# Altium PCB Keypadmacro.PcbDoc
Units mm, origin at the board's own origin, x right, y up, seen from the top; angles counter-clockwise.
Board outline 70 x 90 mm, 2 copper layers (F.Cu, B.Cu), stack 1.671 mm thick; 73 components, 71 nets, 268 pads, 1 vias.
Unrouted connection lines stored in the file: 117.
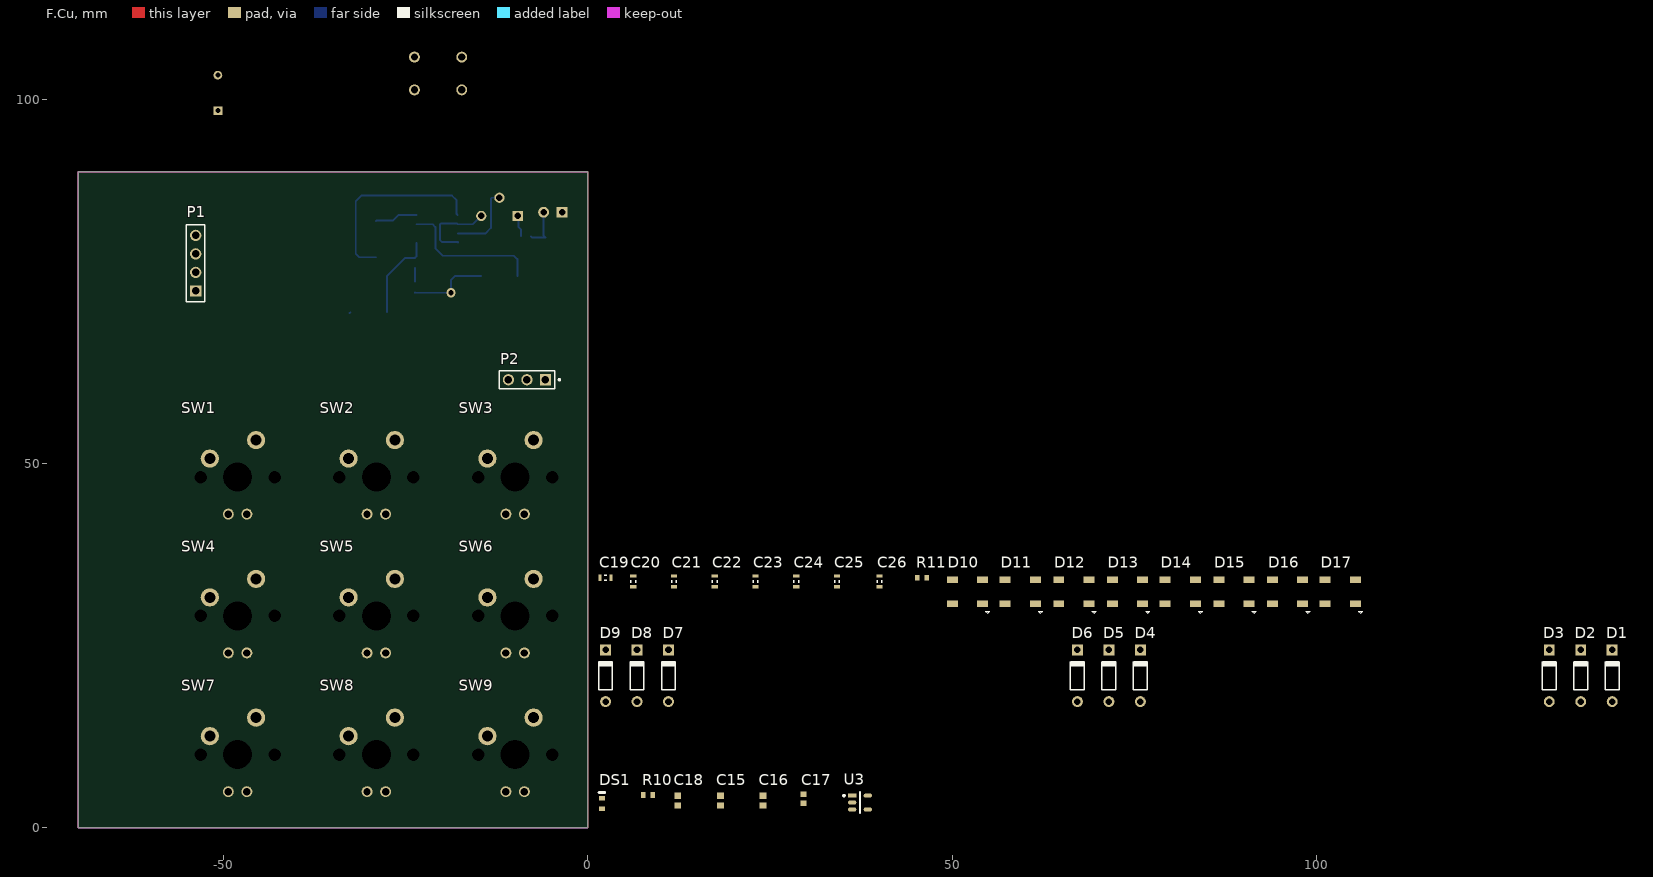
[diagram p0: F.Cu view]
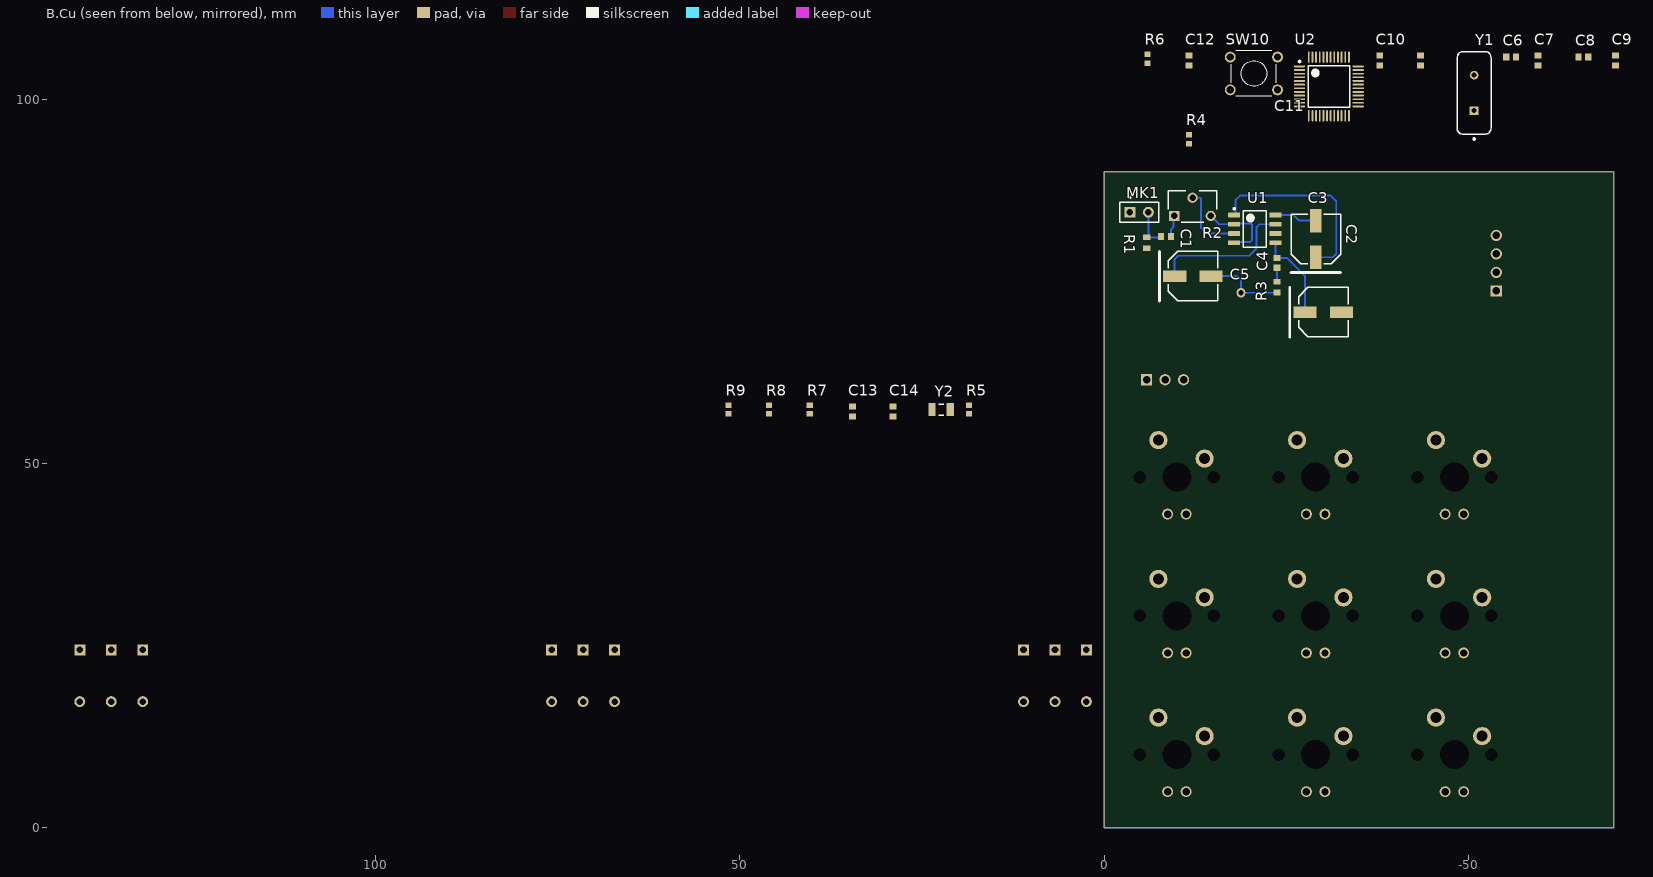
[diagram p1: B.Cu view, seen from below]

## Layer stack, top to bottom
F.Mask: solder mask 0.0102, Solder Resist, Dk 3.5
F.Cu: signal copper 0.0356
Dielectric 1: dielectric 1.6, FR-4, Dk 4.8
B.Cu: signal copper 0.0356
B.Mask: solder mask 0.0102, Solder Resist, Dk 3.5

## Board outline
-70,0 -70,90 0,90 0,0 -70,0

## Design rules (kind name [scope] priority, off if disabled: settings)
Clearance "Clearence 0.2_NetClass" [InNetClass('Default')] p1: gap=0.2 ignorepadtopadclearanceinfootprint=FALSE
HoleSize "Hole Size (Default)" [All] p1: absolutevalues=TRUE maxlimit=10 minlimit=0.3 maxpercent=80.000 minpercent=20.000
MinimumSolderMaskSliver [All] p1: minsoldermaskwidth=0
PolygonConnect [All] p1: connectstyle=Direct reliefconductorwidth=0.254 reliefentries=4 polygonreliefangle="90 Angle" airgapwidth=0.254
RoutingVias [All] p1: holewidth=0.711 width=1.27 viastyle="Through Hole" minholewidth=0.711 minwidth=1.27 maxholewidth=0.711 maxwidth=1.27
SilkToSilkClearance [All] p1: silktosilkclearance=0
SilkToSolderMaskClearance [IsPad] p1: minsilkscreentomaskgap=0 clearancetoexposedcopper=TRUE
SolderMaskExpansion [All] p1: expansion=0.102 istentingtop=FALSE
Width [All] p1: maxlimit=0.254 minlimit=0.254 preferedwidth=0.254
26 further rules are at their usual default settings.

## Classes and differential pairs
component class Designator: C1 C2 C3 C4 C5 MK1 R1 R2 R3 U1
component class Keypadmacro: J1 J2 P1 P2

## Components (designator, comment, footprint, x,y, rotation, side; value= is the part's Value field where it differs from the comment)
C1 "GRM188R60J106ME47D" CAPC1608X90X35NL10T15 -8.509,81.153 r180 bottom
C2 "EEEFP1V470AP" PNSC-FP-V-D_V -30.099,70.739 r180 bottom
C3 "EEEFP1V470AP" PNSC-FP-V-D_V -29.083,80.772 r90 bottom
C4 "GRM188R60J106ME47D" CAPC1608X90X35NL10T15 -23.749,77.515 r90 bottom
C5 "EEEFP1V470AP" PNSC-FP-V-D_V -12.192,75.692 r180 bottom
C6 "10uF" CAPC1608X90X35NL10T15 -55.88,105.791 r180 bottom
C7 "10uF" CAPC1608X90X35NL10T15 -59.563,105.283 r90 bottom
C8 "10uF" CAPC1608X90X35NL10T15 -65.786,105.791 r180 bottom
C9 "10uF" CAPC1608X90X35NL10T15 -70.231,105.283 r90 bottom
C10 "20pF" CAPC1608X90X35NL10T15 -37.846,105.283 r90 bottom
C11 "20pF" CAPC1608X90X35NL10T15 -43.434,105.283 r90 bottom
C12 "10uF" CAPC1608X90X35NL10T15 -11.684,105.283 r90 bottom
C13 "20pF" CAPC1608X90X35NL10T15 34.544,57.115 r90 bottom
C14 "20pF" CAPC1608X90X35NL10T15 28.956,57.115 r90 bottom
C15 "10uF" CAPC1608X90X35NL10T15 18.161,3.683 r90 top
C16 "10uF" CAPC1608X90X35NL10T15 24.003,3.683 r90 top
C17 "1uF" CAPC1608X90X35LL10T15 29.591,3.937 r90 top
C18 "10uF" CAPC1608X90X35NL10T15 12.319,3.683 r90 top
C19 "100nF" CAPC1608X90X20LL10 2.413,34.29 r0 top
C20 "100nF" CAPC1608X90X20LL10 6.223,33.782 r90 top
C21 "100nF" CAPC1608X90X20LL10 11.811,33.782 r90 top
C22 "100nF" CAPC1608X90X20LL10 17.399,33.782 r90 top
C23 "100nF" CAPC1608X90X20LL10 22.987,33.782 r90 top
C24 "100nF" CAPC1608X90X20LL10 28.575,33.782 r90 top
C25 "100nF" CAPC1608X90X20LL10 34.163,33.782 r90 top
C26 "100nF" CAPC1608X90X20LL10 40.005,33.782 r90 top
D1 "Diode 1N4148" DO-35 140.589,20.828 r90 top
D2 "Diode 1N4148" DO-35 136.271,20.828 r90 top
D3 "Diode 1N4148" DO-35 131.953,20.828 r90 top
D4 "Diode 1N4148" DO-35 75.819,20.828 r90 top
D5 "Diode 1N4148" DO-35 71.501,20.828 r90 top
D6 "Diode 1N4148" DO-35 67.183,20.828 r90 top
D7 "Diode 1N4148" DO-35 11.049,20.828 r90 top
D8 "Diode 1N4148" DO-35 6.731,20.828 r90 top
D9 "Diode 1N4148" DO-35 2.413,20.828 r90 top
D10 "WS2182B ADD LED 3.3V-5V" WS2182B 52.07,32.385 r0 top
D11 "WS2182B ADD LED 3.3V-5V" WS2182B 59.309,32.385 r0 top
D12 "WS2182B ADD LED 3.3V-5V" WS2182B 66.675,32.385 r0 top
D13 "WS2182B ADD LED 3.3V-5V" WS2182B 74.041,32.385 r0 top
D14 "WS2182B ADD LED 3.3V-5V" WS2182B 81.28,32.385 r0 top
D15 "WS2182B ADD LED 3.3V-5V" WS2182B 88.646,32.385 r0 top
D16 "WS2182B ADD LED 3.3V-5V" WS2182B 96.012,32.385 r0 top
D17 "WS2182B ADD LED 3.3V-5V" WS2182B 103.251,32.385 r0 top
DS1 "TLMS1000-GS08" VISH-TLMS1000_V 1.905,3.302 r90 top
MK1 "Mic2" PIN2 -3.556,84.455 r180 bottom
P1 "TSW-104-08-T-S" SMTC-TSW-104-08-X-S -53.848,73.66 r90 top
P2 "22-28-4033" MOLX-22-28-4033_V -8.382,61.468 r180 top
R1 "RT0603DRE0710KL" RESC1608X55X25ML10T15 -5.855,80.264 r270 bottom
R2 "PV37W101C01B00" FP-PV37W101C01B00-MFG -12.152,85.247 r0 bottom
R3 "RT0603DRE0710KL" RESC1608X55X25ML10T15 -23.749,74.168 r90 bottom
R4 "ERT-J1VR103J" RESC1608X90X30LL15T20 -11.684,94.488 r90 bottom
R5 "ERT-J1VR103J" RESC1608X90X30LL15T20 18.542,57.369 r90 bottom
R6 "ERT-J1VR103J" RESC1608X90X30LL15T20 -5.969,105.537 r90 bottom
R7 "ERT-J1VR103J" RESC1608X90X30LL15T20 40.386,57.369 r90 bottom
R8 "ERT-J1VR103J" RESC1608X90X30LL15T20 45.974,57.369 r90 bottom
R9 "ERT-J1VR103J" RESC1608X90X30LL15T20 51.562,57.369 r90 bottom
R10 "470R" RESC1608X55X25LL10T15 8.255,4.445 r0 top
R11 "100R" RESC1608X55X25LL10T15 45.847,34.29 r0 top
SW1 "Cherry MX with an LED" MX_Cherry_LED -48.1,48.1 r0 top
SW2 "Cherry MX with an LED" MX_Cherry_LED -29.05,48.1 r0 top
SW3 "Cherry MX with an LED" MX_Cherry_LED -10,48.1 r0 top
SW4 "Cherry MX with an LED" MX_Cherry_LED -48.1,29.05 r0 top
SW5 "Cherry MX with an LED" MX_Cherry_LED -29.05,29.05 r0 top
SW6 "Cherry MX with an LED" MX_Cherry_LED -10,29.05 r0 top
SW7 "Cherry MX with an LED" MX_Cherry_LED -48.1,10 r0 top
SW8 "Cherry MX with an LED" MX_Cherry_LED -29.05,10 r0 top
SW9 "Cherry MX with an LED" MX_Cherry_LED -10,10 r0 top
SW10 "430156070736" 430156070736 -20.574,103.505 r180 bottom
U1 "LM386M-1" D0008A_M -20.701,82.169 r180 bottom
U2 "STM32F103C8T6" STM-LQFP48_L -30.861,101.727 r180 bottom
U3 "MIC5219-3.3YM5-TR" FP-SOT23-5LD-PL-1-IPC_C 37.338,3.429 r0 top
Y1 "FOXSLF/080-20" FOX-FOXSLF080-20 -50.8,100.838 r90 bottom
Y2 "ABS07-120-32.768KHZ-T" ABRA-ABS07_A_V 22.352,57.369 r180 bottom

## Footprints (in the part's own frame and the unit in brackets; to place one, negate y for a bottom-side part, rotate by r counter-clockwise, add the part's x,y. Pads: shape width x height; smd on the part's side, far side on the other; paste and mask are expansions set on the pad)
430156070736 [mm] "6*6mm vertical type, THT, height 7.0mm, salmon actuator, 360gf, Bulk"
  round 1.5 hole 1: 1(-3.25,2.25) 2(-3.25,-2.25) 3(3.25,2.25) 4(3.25,-2.25)
  silkscreen extent -3.1,-3.1 3.1,3.1, body extent -3.95,-3.1 3.95,3.1, height 7.01
ABRA-ABS07_A_V [mm] "SMD, 2-Leads, Body 3.2x1.5mm"
  rect 1x1.8 smd: 1(-1.25,0) 2(1.25,0)
  silkscreen extent -0.35,-0.75 0.35,0.75, body extent -1.6,-0.75 1.6,0.75, height 0.9
CAPC1608X90X20LL10 [mm] "Chip Capacitor, 2-Leads, Body 1.70x0.90mm, IPC High Density"
  rect 0.45x0.85 smd: 1(-0.75,0) 2(0.75,0)
  silkscreen extent -0.15,-0.33 0.15,0.33, body extent -0.85,-0.45 0.85,0.45, height 0.9
CAPC1608X90X35LL10T15 [mm] "Chip Capacitor, 2-Leads, Body 1.60x0.80mm, IPC High Density"
  rect 0.75x0.85 smd: 1(-0.625,0) 2(0.625,0)
  body extent -0.85,-0.45 0.85,0.45, height 0.9
CAPC1608X90X35NL10T15 [mm] "Chip Capacitor, 2-Leads, Body 1.60x0.80mm, IPC Medium Density"
  rect 0.85x0.95 smd: 1(-0.675,0) 2(0.675,0)
  body extent -0.85,-0.45 0.85,0.45, height 0.9
D0008A_M [mm] "SOIC, 8-Leads, Body 5x4mm, Pitch 1.27mm, IPC Low Density"
  rrect15% 1.65x0.65 smd: 1(-2.825,1.905) 2(-2.825,0.635) 3(-2.825,-0.635) 4(-2.825,-1.905) 5(2.825,-1.905) 6(2.825,-0.635) 7(2.825,0.635) 8(2.825,1.905)
  silkscreen extent -2.95,-2.5 1.6,2.9, body extent -3,-2.45 3,2.45, height 1.63
DO-35 [mm] "Diode, Axial; Body 3.8 x 1.9 mm (LxDia. max), Lead Dia. 0.53 mm (max)"
  round 1.5 hole 0.9: 1(-3.55,0)
  rect 1.5x1.5 hole 0.9: 2(3.55,0)
  silkscreen extent -1.95,-0.95 2.05,0.95
FOX-FOXSLF080-20 [mm] "THD, 2-Leads, Body 11.35x4.65mm"
  rect 1.2x1.2 hole 0.7: 1(-2.44,0)
  round 1.2 hole 0.7: 2(2.44,0)
  silkscreen extent -6.45,-2.32 5.68,2.32, body extent -5.67,-2.32 5.68,2.33, height 3.6
FP-PV37W101C01B00-MFG [mm]
  rect 1.4x1.4 hole 0.9 paste-1000 mask+0: 1(2.5,1.3)
  round 1.4 hole 0.9 paste-1000 mask+0: 2(0,-1.2) 3(-2.5,1.3)
  silkscreen extent -3.35,-2.15 3.35,2.15, body extent -3.2,-2 3.2,2, height 8.3
FP-SOT23-5LD-PL-1-IPC_C [mm]
  rect 1.156x0.53 smd paste+0 mask+0: 1(-1.075,0.95)
  rrect100% 1.156x0.53 smd paste+0 mask+0: 2(-1.075,0) 3(-1.075,-0.95) 4(1.075,-0.95) 5(1.075,0.95)
  silkscreen extent -2.33,-1.45 0,1.45, body extent -1.75,-1.55 1.75,1.55, height 0.25
MOLX-22-28-4033_V [mm] "THD, 3-Leads, Body 7.62x2.49mm, Pitch 2.54mm"
  rect 1.55x1.55 hole 1.02: 1(-2.54,0)
  round 1.55 hole 1.02: 2(0,0) 3(2.54,0)
  silkscreen extent -4.59,-1.24 3.81,1.24, body extent -3.81,-1.24 3.81,1.24, height 8.38
MX_Cherry_LED [mm] "Cherry Key Pad with LED"
  round 2.5 hole 1.5: 1(2.54,5.08) 2(-3.81,2.54)
  round 1.5 hole 1: 3(-1.27,-5.08) 4(1.27,-5.08)
  round 0 hole 1.702: 6(-5.08,0) 6(5.08,0)
  round 0 hole 3.988: Hole(0,0)
  body extent -7.75,-7.8 7.85,7.8, height 14.9
PIN2 [mm] "Photosensitive Diode; 2 Leads"
  rect 1.5x1.5 hole 0.9: 1(0,0)
  round 1.5 hole 0.9: 2(2.54,0)
  silkscreen extent -1.4,-1.4 3.94,2.17
PNSC-FP-V-D_V [mm] "CAPAE, 2-Leads, Body 6.80x6.80mm"
  rect 3.2x1.6 smd: 1(-2.5,0) 2(2.5,0)
  silkscreen extent -4.6,-3.4 3.4,3.4, body extent -3.9,-3.4 3.9,3.4, height 6.1
RESC1608X55X25LL10T15 [mm] "Chip Resistor, 2-Leads, Body 1.70x0.90mm, IPC High Density"
  rect 0.6x0.8 smd: 1(-0.65,0) 2(0.65,0)
  body extent -0.85,-0.45 0.85,0.45, height 0.55
RESC1608X55X25ML10T15 [mm] "Chip Resistor, 2-Leads, Body 1.60x0.80mm, IPC Low Density"
  rect 0.8x1 smd: 1(-0.75,0) 2(0.75,0)
  body extent -0.85,-0.45 0.85,0.45, height 0.55
RESC1608X90X30LL15T20 [mm] "Chip Resistor, 2-Leads, Body 1.60x0.80mm, IPC High Density"
  rect 0.75x0.85 smd: 1(-0.6,0) 2(0.6,0)
  body extent -0.87,-0.48 0.88,0.48, height 0.9
SMTC-TSW-104-08-X-S [mm] ".025 SQ Post Terminal Strip Assembly, 1x4 Pins, Vertical, 2.54mm Pitch, Male"
  rect 1.55x1.55 hole 1.02: 1(0,0)
  round 1.55 hole 1.02: 2(2.54,0) 3(5.08,0) 4(7.62,0)
  silkscreen extent -1.46,-1.27 9.08,1.27, body extent -1.27,-1.27 8.89,1.27, height 8.38
STM-LQFP48_L [mm] "QFP, 48-Leads, Body 7x7mm, Pitch 0.5mm, IPC High Density"
  oval 1.55x0.25 smd: 1(-4.025,2.75) 2(-4.025,2.25) 3(-4.025,1.75) 4(-4.025,1.25) 5(-4.025,0.75) 6(-4.025,0.25) 7(-4.025,-0.25) 8(-4.025,-0.75) 9(-4.025,-1.25) 10(-4.025,-1.75) 11(-4.025,-2.25) 12(-4.025,-2.75) 25(4.025,-2.75) 26(4.025,-2.25) 27(4.025,-1.75) 28(4.025,-1.25) 29(4.025,-0.75) 30(4.025,-0.25) 31(4.025,0.25) 32(4.025,0.75) 33(4.025,1.25) 34(4.025,1.75) 35(4.025,2.25) 36(4.025,2.75)
  oval 0.25x1.55 smd: 13(-2.75,-4.025) 14(-2.25,-4.025) 15(-1.75,-4.025) 16(-1.25,-4.025) 17(-0.75,-4.025) 18(-0.25,-4.025) 19(0.25,-4.025) 20(0.75,-4.025) 21(1.25,-4.025) 22(1.75,-4.025) 23(2.25,-4.025) 24(2.75,-4.025) 37(2.75,4.025) 38(2.25,4.025) 39(1.75,4.025) 40(1.25,4.025) 41(0.75,4.025) 42(0.25,4.025) 43(-0.25,4.025) 44(-0.75,4.025) 45(-1.25,4.025) 46(-1.75,4.025) 47(-2.25,4.025) 48(-2.75,4.025)
  silkscreen extent -4.15,-2.85 2.85,3.55, body extent -3.5,-3.5 3.5,3.5, height 1.6
VISH-TLMS1000_V [mm] "SMD, 2-Leads, Body 0.8x1.6mm"
  rect 0.6x0.8 smd: 1(-0.725,0) 2(0.725,0)
  silkscreen extent 1.52,-0.4 1.52,0.4, body extent -0.8,-0.4 0.8,0.4, height 0.65
WS2182B [mm]
  rect 1.5x0.9 smd: 1(-2.058,1.651) 2(-2.058,-1.649) 3(2.092,-1.649) 4(2.092,1.651)
  silkscreen extent 2.49,-2.97 3.1,-2.67, body extent -2.68,-2.47 2.68,2.47, height 1.7

## Part data
C1 C4: library part CMP-2006-02792-1, Manufacturer=Murata, Part Number=GRM188R60J106ME47D
C2 C3 C5: library part CMP-2000-06216-1, "Aluminum Electrolytic Capacitor, 47 uF, +/- 20%, 35 V, 2-Pin SMD (Size Code D), -55 to 105 degC, RoHS, Tape and Reel", Capacitance=47µF, Case Size/Dimension=Ø6.3x5.8mm, ESR (Equivalent Series Resistance)=0.26O, Lifetime@Temperature=2000Hrs@105°C, Manufacturer=Panasonic, Operating Temp Range=-55to+105°C, Operating Temp-Max=105°C, Package Description="2-Pin Electrolytic Aluminum Capacitor, Body 6.6 x 6.6 mm", Package Reference=FP-V-D, Rated Voltage=35V, Ripple Current=300mA, Datasheet URL=http://industrial.panasonic.com/cdbs/www-data/pdf/RDE0000/ABA0000C1184.pdf, Datasheet Version=03/2016, Manufacturer URL=http://www.panasonic.com/, Mounting Technology=SurfaceMount, Package URL=http://industrial.panasonic.com/cdbs/www-data/pdf/RDE0000/DME0000COL48.pdf, Series=FP, Type=Can
C6 C7 C8 C9 C10 C11 C12 C13 C14 C15 C16 C18: library part CMP-2006-02792-1, Manufacturer=Murata, Part Number=GRM188R60J106ME47D
C17: library part CMP-2006-02459-1, Manufacturer=Murata, Part Number=GRM188R61E105KA12D
C19 C20 C21 C22 C23 C24 C25 C26: library part CMP-2000-07546-1, "Chip Capacitor, 0.1 uF, +/- 10%, 50 V, -55 to 125 degC, 0603 (1608 Metric), RoHS, Tape and Reel", Case Code (Imperial)=0603, Case Code (Metric)=1608, Dielectric=X7R, Manufacturer=TDK, Max Operating Temperature=125degC, Min Operating Temperature=-55degC, Package Description="2-Pin Surface Mount Device, Body 1.6 x 0.8 mm", Package Quantity=1, Package Reference=603, Tolerance=10%, Voltage=50V, Capacitance=100nF, Case/Package=0603, Composition=Ceramic, Datasheet URL=https://product.tdk.com/info/en/catalog/datasheets/mlcc_automotive_general_en.pdf, Datasheet Version=12/2014, Depth=0.8mm, Height=0.8mm, Lead Free=LeadFree, Length=1.6mm, Manufacturer URL=http://www.tdk.com/, Mount=SurfaceMount, Mounting Technology=SurfaceMount, Packaging=TapeandReel, Radiation Hardening=No, REACH SVHC=NoSVHC, RoHSCompliant=True, Termination=SMD/SMT, Thickness=0.035inch, Voltage Rating=50V, Voltage Rating (DC)=50V, Weight=7.1E-05oz, Width=0.8mm
D1 D2 D3 D4 D5 D6 D7 D8 D9: "High Conductance Fast Diode", Code_JEDEC=DO-204-AH, ComponentLink1Description="Manufacturer Link", ComponentLink1URL=http://www.fairchildsemi.com/, ComponentLink2Description=Datasheet, ComponentLink2URL=http://www.fairchildsemi.com/ds/1N%2F1N4148.pdf, DatasheetVersion=1997, LatestRevisionDate=17-Jul-2002, LatestRevisionNote="Re-released for DXP Platform.", PackageDescription="Diode, Axial; Body 3.8 x 1.9 mm (LxDia. max), Lead Dia. 0.53 mm (max)", PackageReference=DO-35, Published=8-Jun-2000, Publisher="Altium Limited"
D10 D11 D12 D13 D14 D15 D16 D17: library part WS2182B
DS1: library part CMP-2000-07254-1, "Low Current LED, 40 mW, 1.8 V, -40 to 100 degC, 2-Pin SMD (0603), RoHS, Tape and Reel", Forward Current If=2mA, Forward Voltage=1.8V, LED Colour=Red, Manufacturer=Vishay, Package Description="2-Pin Surface Mount Device, Body 1.6 x 0.8 mm", Package Reference=TLMS1000, Automotive Qualification Standard=AEC-Q100, Bulb Size=1.6mmx0.8mm, Datasheet URL=https://datasheet.ciiva.com/5798/1698881-5798337.pdf, Datasheet Version="Rev. 1.7, 02/2011", LED Mounting=SMD, Lens Shape=Rectangular, Luminous Intensity=4mcd, Manufacturer URL=http://www.vishay.com/, Mounting Technology=SurfaceMount, MSL=MSL2-1year, Packaging=CutTape, Product Range=-, SVHC=ToBeAdvised, Viewing Angle=80°, Wavelength Typ=636nm
MK1: "Microphone", LatestRevisionDate=17-Jul-2002, LatestRevisionNote="Re-released for DXP Platform.", PackageReference=PIN2, Published=24-Mar-1999, Publisher="Altium Limited"
P1: library part CMP-1024-00356-1, "0.025\" SQ Post Header, Through-hole, Vertical, -55 to 105 degC, 2.54 mm Pitch, 4-Pin, Male, RoHS", Manufacturer=Samtec, Temperature Range="-55 to 105 degC", ComponentLink1Description="Manufacturer URL", ComponentLink1URL=http://www.samtec.com, ComponentLink2Description=Datasheet, ComponentLink2URL=http://www.samtec.com/documents/webfiles/pdf/TSW_TH.PDF, ComponentLink3Description="Package Specification", ComponentLink3URL=http://www.samtec.com/documents/webfiles/cpdf/TSW-XXX-XX-XXX-X-XX-XXX-MKT.pdf, DatasheetVersion=F-214, Mounting Technology=Through-hole, Orientation=Vertical, PackageDescription=".025[0.64] SQ. Post Terminal Strip Assembly", PackageReference=TSW-104-08-X-S, PackageVersion="DM, 8/1988", PartNumber=TSW-104-08-T-S, Pitch="2.54 mm", RoHS=True
P2: library part CMP-1676-00001-5, "Male Header, Pitch 2.54 mm, 1 x 3 Position, Height 8.38 mm, Tail Length 3.18 mm, RoHS, Bulk", Colour=Black, Current Rating="4 A", Manufacturer=Molex, Max Operating Temperature="75 degC", Min Operating Temperature="0 degC", Package Quantity=1, Voltage Rating="250 V", ComponentLink1Description="Manufacturer URL", ComponentLink1URL=http://www.molex.com/, ComponentLink2Description=Datasheet, ComponentLink2URL=http://www.molex.com/pdm_docs/sd/022284033_sd.pdf, Contact Finish=Gold, Contact Material=Brass, Contact Plating=Gold, DatasheetVersion="Rev. G, 01/2012", Height="8.38 mm", Lead Pitch="0.1 inch", Length="7.62 mm", Mount="Through Hole", Mounting Technology="Through Hole", PackageDescription="Male Header, Pitch 2.54 mm, 1 x 3 Position, Height 8.38 mm, Tail Length 3.18 mm", PackageReference=22-28-4033, Packaging=Bulk, Pins=3, REACH SVHC=Unknown, RoHSCompliant=true, Rows=1
R1 R3: library part CMP-2000-04608-1, Manufacturer=Yageo, Part Number=RT0603DRE0710KL
R2: library part CMP-06028-000002-1, "TRIMMER 100 OHM 0.25W PC PIN TOP", Color=Grey, Max Operating Temperature=125°C, Max Power Dissipation=250mW, Min Operating Temperature=-55°C, Package Quantity=50, Resistance=100R, Temperature Coefficient=150ppm/°C, Tolerance=10%, Composition=Cermet, Height=0.264inch, Lead Free="Lead Free", Length=0.252inch, Mount="Through Hole", Number of Turns=12, Packaging=Bulk, Power Rating=250mW, Radiation Hardening=No, Taper=Linear, Termination="PC Pin", Weight=340mg, Width=0.157inch
R4 R5 R6 R7 R8 R9: library part CMP-2000-00869-1, Manufacturer=Panasonic, Part Number=ERT-J1VR103J
R10 R11: library part CMP-1659-00035-1, "General Purpose Chip Resistor, 470 Ohm, +/- 1%, -55 to 155 degC, 0603 (1608 Metric), RoHS, Tape and Reel", Max Operating Temperature="90 degC", Min Operating Temperature="-40 degC", Package Quantity=2500, Resistance="50 Ohm", ComponentLink1Description="Manufacturer URL", ComponentLink1URL=http://www.yageo.com/, ComponentLink2Description=Datasheet, ComponentLink2URL=https://datasheet.ciiva.com/11808/0900766b80f96399-11808177.pdf, Contact Material=Brass, Contact Plating=Gold, DatasheetVersion="Rev. 4, 04/2009", Fastening Type=Snap, Height="1.25 mm", Impedance="50 Ohm", Length="3 mm", Mount="Surface Mount", PackageDescription="2-Pin Surface Mount Device, Body 1.6 x 0.8 mm", PackageReference=0603, Packaging="Tape and Reel", Radiation Hardening=No, RoHSCompliant=true, Width="3.1 mm"
SW1 SW2 SW3 SW4 SW5 SW6 SW7 SW8 SW9: library part MX_Cherry_LED
SW10: library part CMP-1453-00006-1, "WS-TATV THT Tact Switch 6X6 mm", Manufacturer="Wuerth Elektronik", ComponentLink1Description="Manufacturer URL", ComponentLink1URL=http://www.we-online.com, ComponentLink2Description=Datasheet, ComponentLink2URL=http://katalog.we-online.de/em/datasheet/4301x6.pdf, NoPins=04, PackageReference=430156070736, PartNumber=430156070736
U1: library part CMP-0057-00421-3, "Low Voltage Audio Power Amplifier, 8-pin Narrow SOIC", Manufacturer="Texas Instruments", PackageTopMarking=NSZXTT*LM386*M-1, PowerWise=N, Code_IPC=SOIC127P600-8, Code_JEDEC=MS-012-AA, ComponentLink1Description="Datasheet URL", ComponentLink1URL=http://www.ti.com/general/docs/lit/getliterature.tsp?genericPartNumber=LM386&fileType=pdf, CompType="Audio IC", PackageDescription="SOIC Narrow, 4.9 x 3.9 x 1.45mm, 8 Lead, 1.27mm Pitch", PackageReference=D0008A, PinCount=8, RoHS=N
U2: library part CMP-0237-00215-3, "ARM Cortex-M3 32-bit MCU, 64 KB Flash, 20 KB Internal RAM, 37 I/Os, 48-pin LQFP, -40 to 85 degC, Tray", I/Os (High Current)=37, Operating Frequency(F) (Processor speed) (MHz)=72, Supply Voltage(Vcc) min (V)=2, A/D Converter="2x12-bit (10 Channel)", ComponentLink1Description="Manufacturer URL", ComponentLink1URL=http://www.st.com/web/en/home.html, ComponentLink2Description=Datasheet, ComponentLink2URL=http://www.st.com/st-web-ui/static/active/en/resource/technical/document/datasheet/CD00161566.pdf, ComponentLink3Description="Package Specification", ComponentLink3URL=http://www.st.com/st-web-ui/static/active/en/resource/technical/document/datasheet/DM00058181.pdf, Core="ARM Cortex-M3", DatasheetVersion="Rev. 16", FLASH Size (Prog) (kB)=64, Internal RAM Size (kB)=20, Mounting Technology="Surface Mount", PackageDescription="48-Pin Low Profile Quad Flat Package, 7 x 7 mm Body, 0.5 mm Pitch", PackageReference=LQFP48, PackageVersion="Rev. 6, 06/2013", Packing=Tray, PartNumber=STM32F103C8T6
U3: library part CMP-06324-000027-1, "IC REG LINEAR 3.3V 500MA SOT23-5", Case/Package=SOT-23-5, Dropout Voltage=350mV, Max Input Voltage=12V, Max Operating Temperature=125°C, Min Input Voltage=2.5V, Min Operating Temperature=-40°C, Nominal Output Voltage=3.3V, Output Current=500mA, Lead Free="Lead Free", Mount="Surface Mount", Number of Pins=5, Number of Regulators=1, Output Type=Fixed, Output Voltage=3.3V, Packaging="Cut Tape", REACH SVHC="No SVHC"
Y1: library part CMP-1749-00002-1, "Resistance Weld Thru-Hole Crystal, 8 MHz, -20 to 70 degC, 2-Pin THD, RoHS, Bulk", Case\Package=TO-263-3, Dropout Voltage="2 V", Max Input Voltage="35 V", Max Operating Temperature="125 degC", Max Ouput Current="1 A", Min Input Voltage="7 V", Min Operating Temperature="0 degC", Nominal Output Voltage="5 V", Package Quantity=50, ComponentLink1Description="Manufacturer URL", ComponentLink1URL=http://www.foxonline.com/, ComponentLink2Description=Datasheet, ComponentLink2URL=http://download.siliconexpert.com/pdfs/2015/4/5/6/5/7/200/fox_/manual/35607121449963728hc49slf.pdf, DatasheetVersion=Mar-15, Height="30.02 mm", Length="10.24 mm", Mount="Surface Mount", Output Current="1 A", Output Voltage="5 V", Outputs=1, PackageDescription="2-Pin Through Hole Device, Body 11.35 x 4.65 mm", PackageReference=FOXSLF080-20, Packaging=Rail/Tube, Pins=3, Radiation Hardening=No, REACH SVHC="No SVHC", RoHSCompliant=true, Width="9.35 mm"
Y2: library part CMP-2000-07587-1, "Tuning Fork Crystal, 32.768 KHz, +/- 20 ppm, -40 to 85 degC, 2-Pin SMD, RoHS, Tape and Reel", Case\/Package=SMD/SMT, ESR (Equivalent Series Resistance)=55KOhm, Frequency=32.768KHz, Frequency Tolerance=20ppm, Load Capacitance=6pF, Manufacturer=Abracon, Max Operating Temperature=85degC, Min Operating Temperature=-40degC, Package Description="2-Pin Surface Mount Device, Body 3.2 x 1.5 mm", Package Quantity=3000, Package Reference=ABS07, Series Resistance=60KOhm, Datasheet URL=http://www.abracon.com/Resonators/ABS07-120-32.768kHz-T.pdf, Datasheet Version=11/2014, Depth=1.5mm, Height=0.035inch, Lead Free=LeadFree, Length=3.2mm, Manufacturer URL=http://www.abracon.com/, Mount=SurfaceMount, Mounting Technology=SurfaceMount, Number of Pins=2, Packaging=TapeandReel, Radiation Hardening=No, REACH SVHC=NoSVHC, RoHSCompliant=True, Termination=SMD/SMT, Tolerance=20ppm, Width=0.061inch

## Via types
v1: diameter 1.27, hole 0.711, F.Cu to B.Cu, 1 vias

## Nets (pads, with @x,y where several pads share a name; then routed paths per layer and width w, separated by ;. In a path a pad name is that pad's centre, name@x,y a point inside that pad or via, vN(x,y) a via of type N, cw(c..) or ccw(c..) an arc to the next point about the centre after c; other vN are vias at no path point)
+3.3V: C15.2 C16.2 C17.2 P1.2 R1.2 R10.1 U1.6 U3.5
+3V3: C6.2 C7.2 C8.2 C9.2 R4.2 R5.2 R6.2 R7.2 U2.1 U2.9 U2.24 U2.36 U2.48 | length 0.2
  B.Cu w0.254: -32.726,70.612 -32.599,70.739
+BATT: C18.2 C19.2 C20.2 C21.2 C22.2 C23.2 C24.2 C25.2 C26.2 D10.1 D11.1 D12.1 D13.1 D14.1 D15.1 D16.1 D17.1 P2.1 U3.1 U3.3
BOOT0: U2.44
CH_COL1: D3.1 D6.1 D9.1 U2.40
CH_COL2: D2.1 D5.1 D8.1 U2.41
CH_COL3: D1.1 D4.1 D7.1 U2.42
CH_ROW1: SW1.1 SW2.1 SW3.1 U2.18
CH_ROW2: SW4.1 SW5.1 SW6.1 U2.19
CH_ROW3: SW7.1 SW8.1 SW9.1 U2.20
D+: R8.2
D-: R9.2
D_IN: R11.1 U2.11
DIN_EXT: P2.2 U2.12
GND: C5.2 C15.1 C16.1 C17.1 C18.1 C19.1 C20.1 C21.1 C22.1 C23.1 C24.1 C25.1 C26.1 D10.3 D11.3 D12.3 D13.3 D14.3 D15.3 D16.3 D17.3 DS1.2 MK1.1 P1.1 P2.3 R2.3 R3.1 SW1.4 SW2.4 SW3.4 SW4.4 SW5.4 SW6.4 SW7.4 SW8.4 SW9.4 U1.2 U1.4 U3.2 | length 22.1
  B.Cu w0.254: R3.1 -23.737,73.406 v1(-18.796,73.406) -18.796,75.184 -18.288,75.692 C5.2 ; U1.4@-17.828,80.312 -17.907,80.391 -20.066,80.391 -20.32,80.645 -20.32,82.782 -20.171,82.931 -18.003,82.931 U1.2 -15.795,82.804 R2.3
MIC_OUT_TO_CONTROLLER: C2.2 U2.10
NetC1_1: C1.1 MK1.2 R1.1 | length 5.6
  B.Cu w0.254: C1.1 -7.695,81.014 R1.1 -6.096,81.255 MK1.2
NetC1_2: C1.2 R2.1 | length 3
  B.Cu w0.254: R2.1 -9.525,83.82 -9.525,82.423 -9.184,82.082 C1.2
NetC2_1: C2.1 C4.2 U1.5 | length 12
  B.Cu w0.254: C2.1 -27.599,75.652 -25.061,78.19 C4.2 -23.526,78.413 U1.5
NetC3_1: C3.1 U1.1 | length 26.7
  B.Cu w0.254: C3.1 -31.409,78.272 -31.877,78.74 -31.877,85.979 -31.115,86.741 -18.669,86.741 -18.034,86.106 -18.034,84.232 U1.1
NetC3_2: C3.2 U1.8 | length 5.9
  B.Cu w0.254: C3.2 -29.043,83.312 -26.797,83.312 -26.035,84.074 U1.8
NetC4_1: C4.1 R3.2 | length 1.9
  B.Cu w0.254: R3.2 C4.1
NetC5_1: C5.1 U1.7 | length 19.9
  B.Cu w0.254: U1.7 -21.336,82.804 -20.955,82.423 -20.955,79.502 -19.939,78.486 -10.16,78.486 -9.692,78.018 C5.1
NetD1_2: D1.2 SW1.2
NetD2_2: D2.2 SW2.2
NetD3_2: D3.2 SW3.2
NetD4_2: D4.2 SW4.2
NetD5_2: D5.2 SW5.2
NetD6_2: D6.2 SW6.2
NetD7_2: D7.2 SW7.2
NetD8_2: D8.2 SW8.2
NetD9_2: D9.2 SW9.2
NetD10_2: D10.2 D11.4
NetD10_4: D10.4 R11.2
NetD11_2: D11.2 D12.4
NetD12_2: D12.2 D13.4
NetD13_2: D13.2 D14.4
NetD14_2: D14.2 D15.4
NetD15_2: D15.2 D16.4
NetD16_2: D16.2 D17.4
NetDS1_1: DS1.1 R10.2
NetR2_2: R2.2 U1.3 | length 10.1
  B.Cu w0.254: U1.3 -14.097,81.534 -13.335,82.296 -13.335,86.298 -13.186,86.447 R2.2
OSCIN: C10.2 U2.5 Y1.1
OSCOUT: C11.2 U2.6 Y1.2
PA3: U2.13
PA4: U2.14
PA5: U2.15
PA6: U2.16
PA7: U2.17
PA8: U2.29
PA9_TX: U2.30
PA11: R9.1 U2.32
PA12: R7.1 R8.1 U2.33
PA13_SWDIO: U2.34
PA14_SWCLK: U2.37
PA15: U2.38
PB3_SWO: U2.39
PB7: U2.43
PB8: U2.45
PB9: U2.46
PB12: U2.25
PB13: U2.26
PB14: U2.27
PB15: U2.28
PC13: U2.2
PC14: C13.2 U2.3 Y2.1
PC15: C14.2 U2.4 Y2.2
RST: C12.2 R4.1 SW10.2 SW10.4 U2.7
RX_PA10: U2.31
SCL: R5.1 U2.21
SDA: R6.1 U2.22
pads on no net: C6.1 C7.1 C8.1 C9.1 C10.1 C11.1 C12.1 C13.1 C14.1 D17.2 P1.3 P1.4 SW1.3 SW1.6 SW1.Hole SW2.3 SW2.6 SW2.Hole SW3.3 SW3.6 SW3.Hole SW4.3 SW4.6 SW4.Hole SW5.3 SW5.6 SW5.Hole SW6.3 SW6.6 SW6.Hole SW7.3 SW7.6 SW7.Hole SW8.3 SW8.6 SW8.Hole SW9.3 SW9.6 SW9.Hole SW10.1 SW10.3 U2.8 U2.23 U2.35 U2.47 U3.4

## Polygon pours and split planes (outlines as drawn)
+3V3 on F.Cu "NONET_L01_P000" (solid, shelved, pour order 0): -70,90 0,90 0,0 -70,0
GND on B.Cu "NONET_L02_P001" (solid, shelved, pour order 1): -70,90 0,90 0,0 -70,0

## Keep-outs
Edge.Cuts:
  lines w0.05: -70,0 0,0 ; -70,0 -70,90 ; -70,0 0,0 ; -70,0 -70,90 ; -70,90 0,90 ; -70,90 0,90 ; 0,0 0,90 ; 0,0 0,90